# Altium PCB PCB2.PcbDoc
Units mil, origin at the board's own origin, x right, y up, seen from the top; angles counter-clockwise.
Board outline 2505 x 3540 mil, 4 copper layers (Top Layer, Int1 (GND), Int2 (GND), Bottom Layer), stack 53.912 mil thick; 42 components, 25 nets, 144 pads, 32 vias.
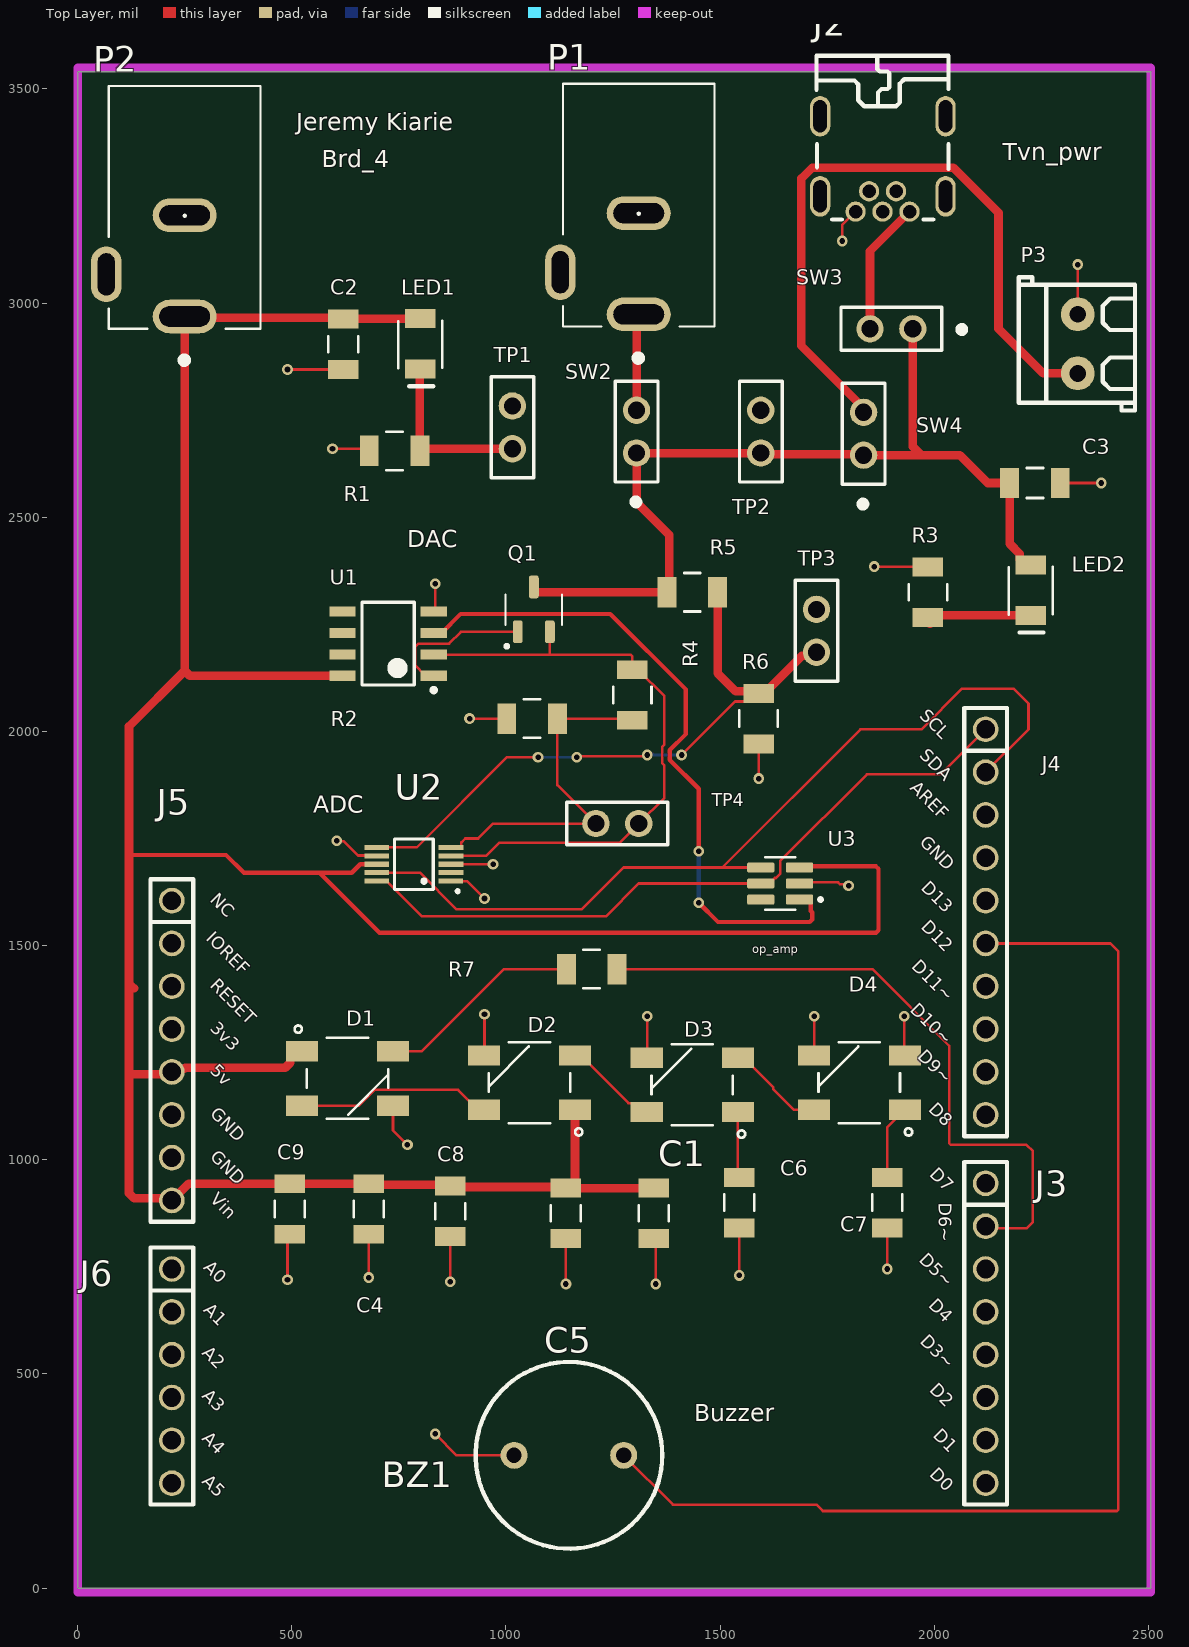
[diagram p0: Top Layer view]
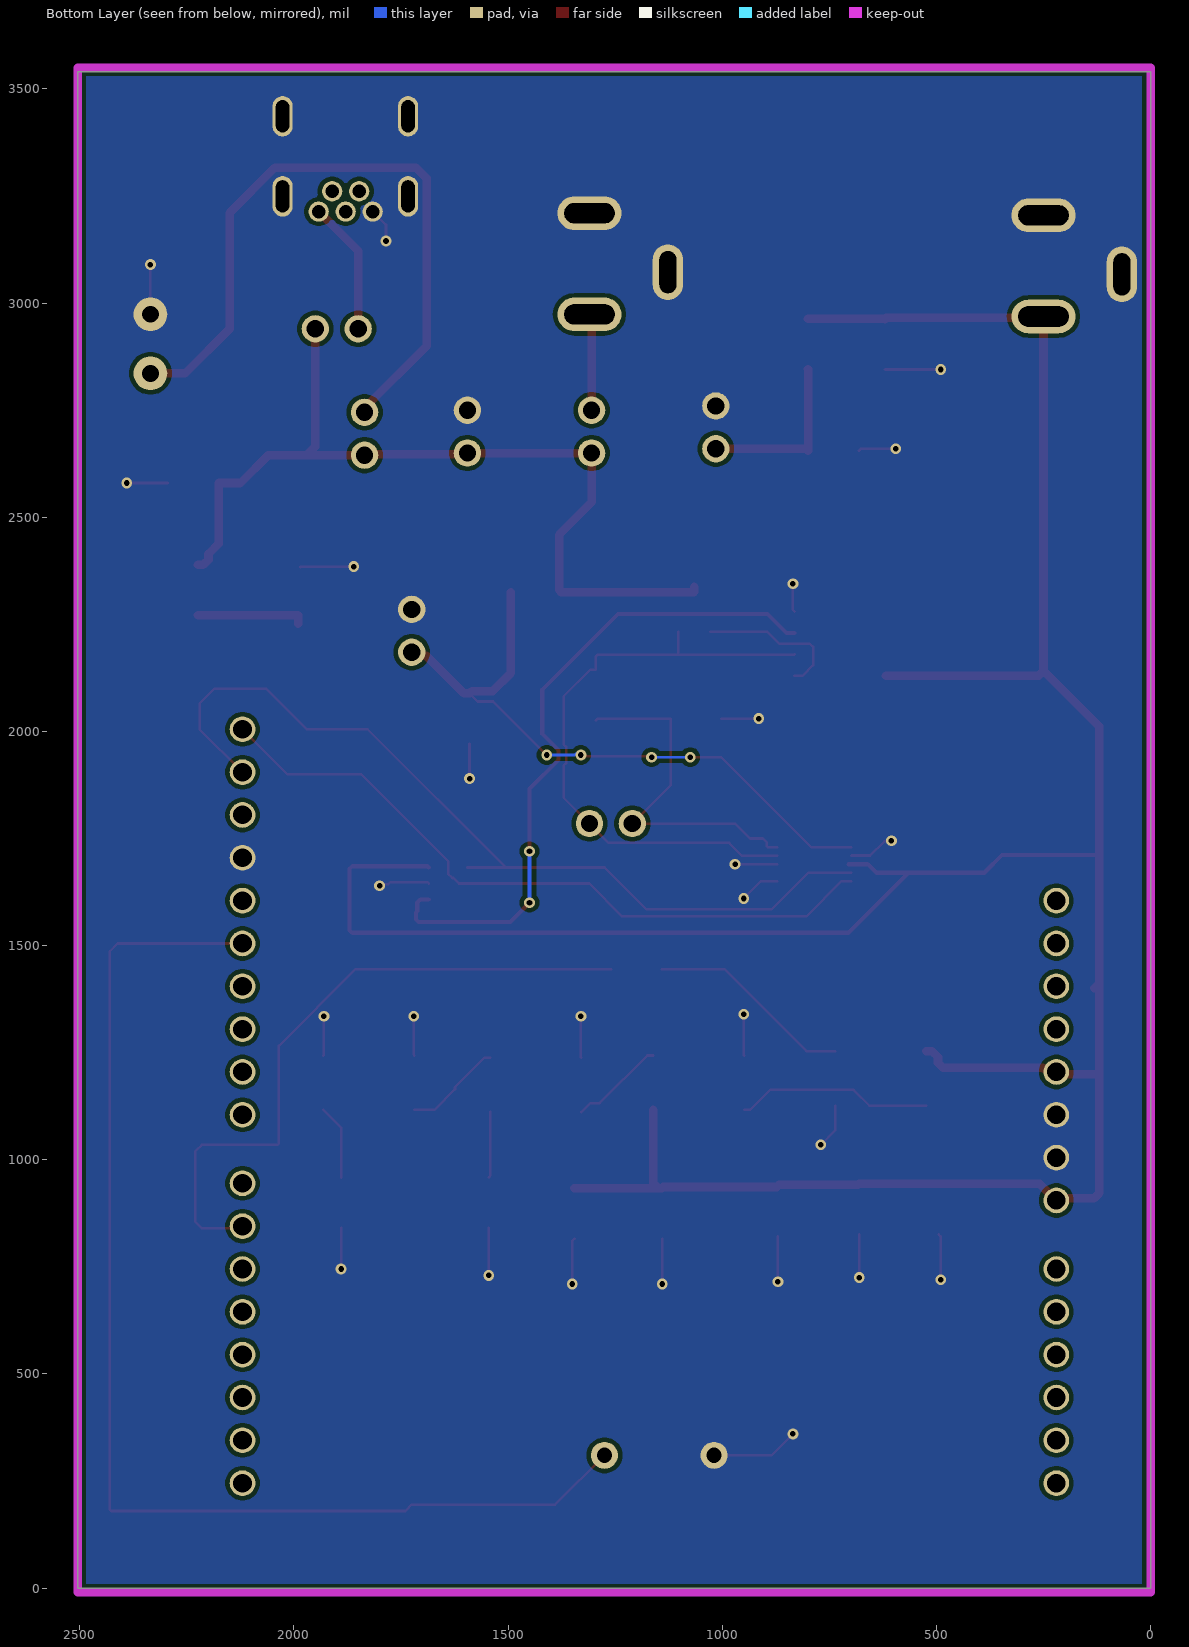
[diagram p1: Bottom Layer view, seen from below]
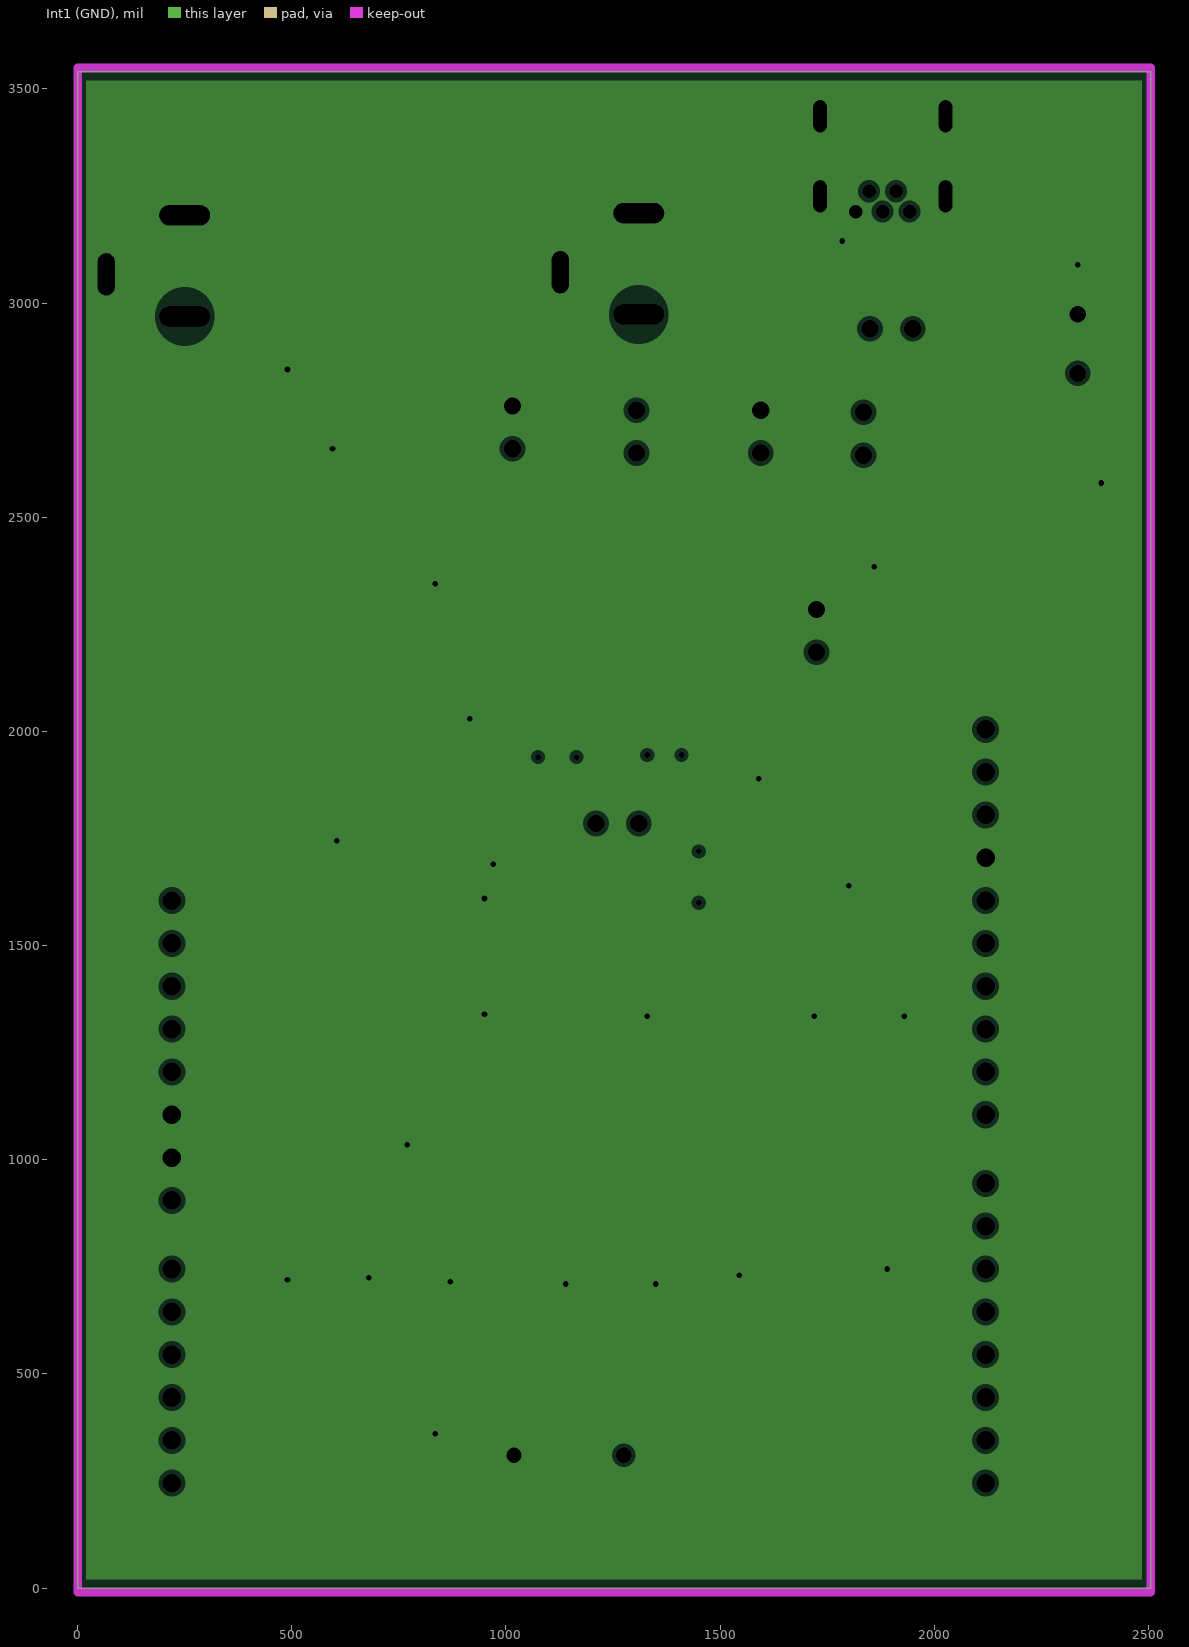
[diagram p2: Int1 (GND), clearances drawn from the general rule]
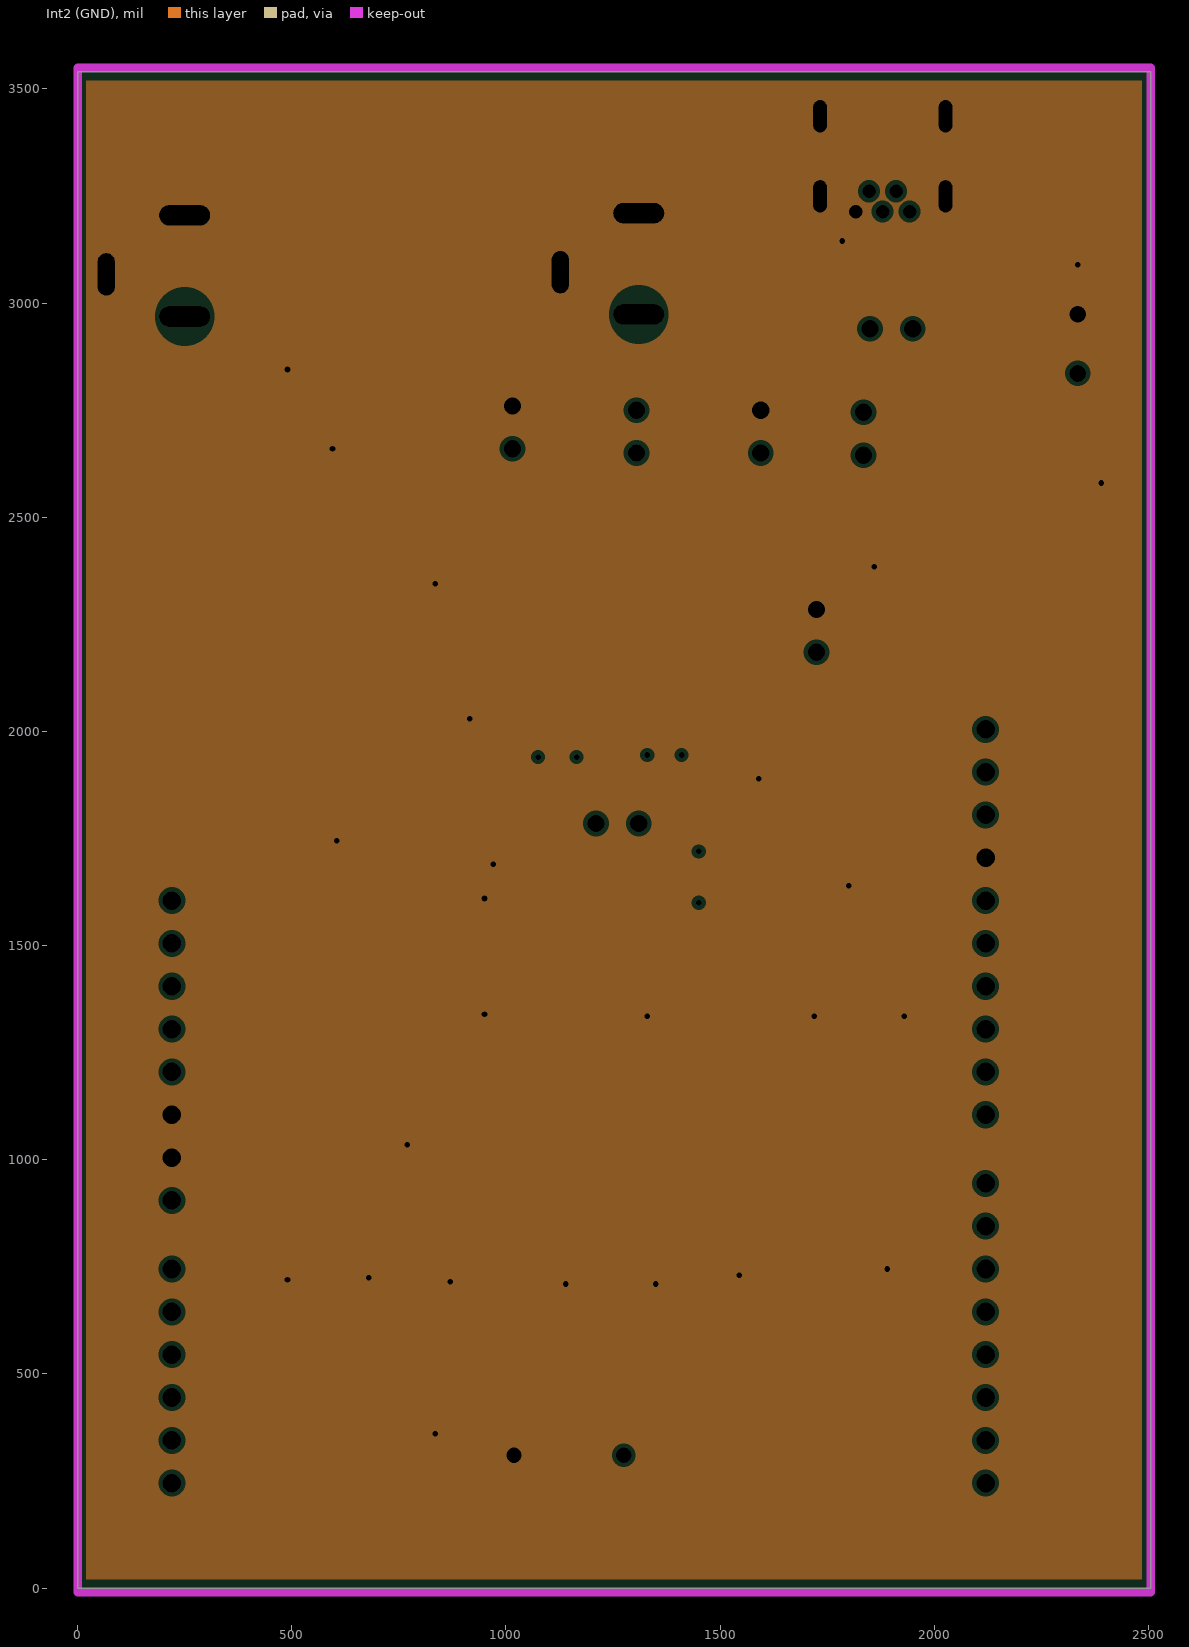
[diagram p3: Int2 (GND), clearances drawn from the general rule]
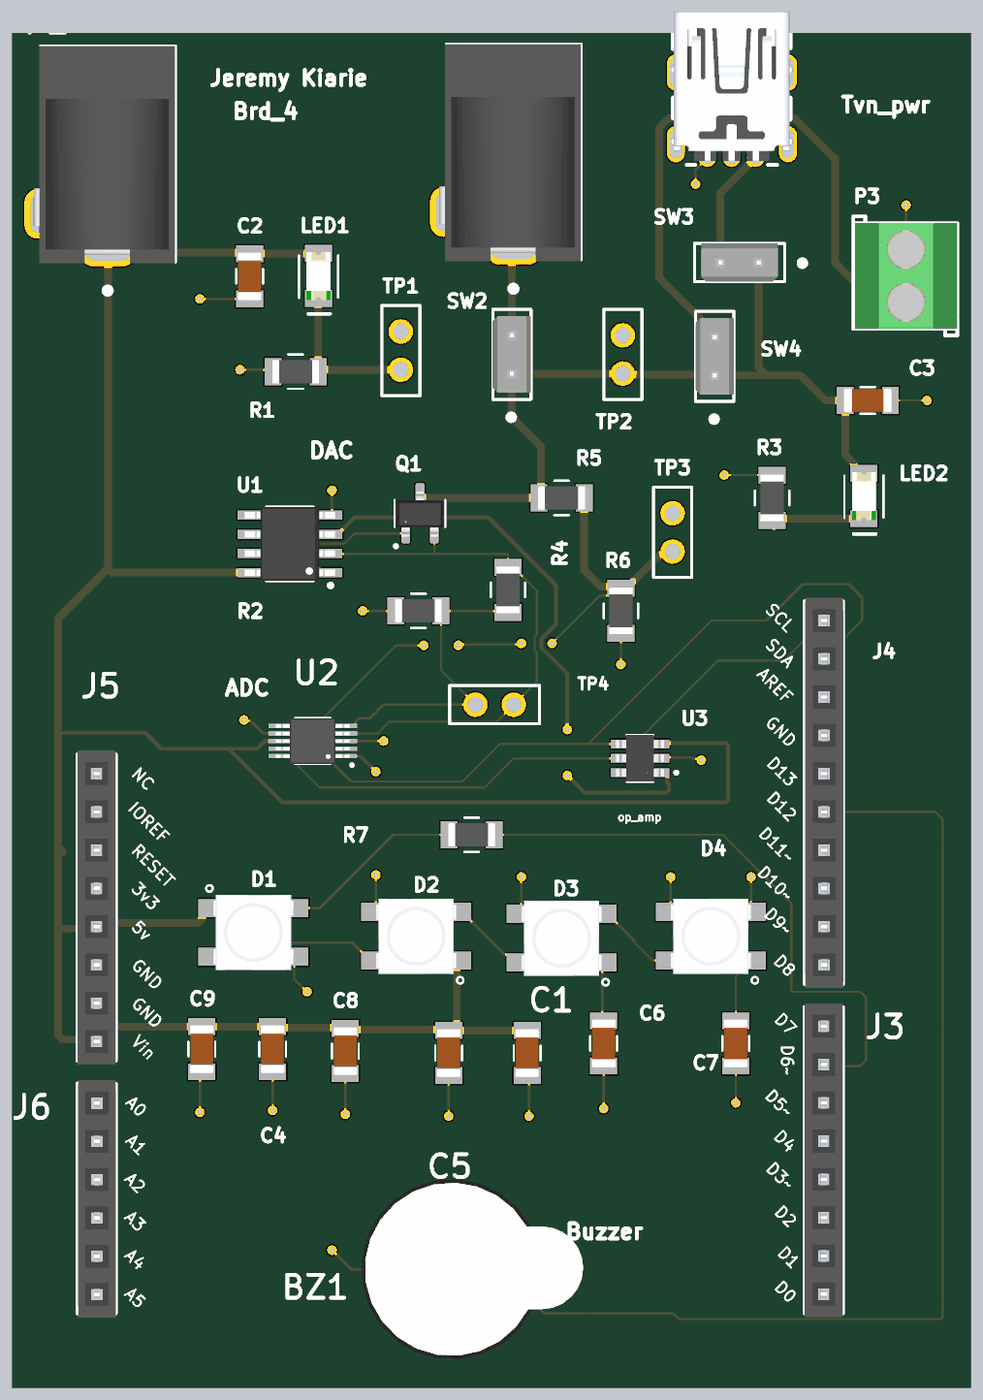
[diagram p4: 3D render of the assembled board from above, using the file's embedded part models]

## Layer stack, top to bottom
Top Solder: solder mask 1, SM-001, Dk 4
Top Layer: signal copper 1.378
Dielectric 1: prepreg 5.1, PP-017, Dk 4.3
Dielectric 2: prepreg 5.1, PP-017, Dk 4.3
Int1 (GND): plane copper 1.378, net GND
Dielectric 3: core 28, Core-039, Dk 4.8
Int2 (GND): plane copper 1.378, net GND
Dielectric 4: prepreg 5.1, PP-017, Dk 4.3
Dielectric 5: prepreg 5.1, PP-017, Dk 4.3
Bottom Layer: signal copper 1.378
Bottom Solder: solder mask 1, SM-001, Dk 4

## Board outline
0,0 2505,0 2505,3540 0,3540

## Design rules (kind name [scope] priority, off if disabled: settings)
Clearance [All] p1: gap=10 ignorepadtopadclearanceinfootprint=FALSE
PlaneClearance [All] p1: clearance=10
PlaneConnect [All] p1: planeconnectstyle=Direct reliefexpansion=20 reliefentries=4 reliefconductorwidth=10 reliefairgap=10
PolygonConnect [All] p1: connectstyle=Direct reliefconductorwidth=10 reliefentries=4 polygonreliefangle="90 Angle" airgapwidth=10
RoutingVias [All] p1: holewidth=13 width=25 viastyle="Through Hole" minholewidth=13 minwidth=25 maxholewidth=60 maxwidth=80
SolderMaskExpansion [All] p1: expansion=4 istentingtop=FALSE
SupplyNets "Schematic Supply Nets" [InNet('GND')] p1: voltage=0.000
UnRoutedNet [All] p1: checkbadconnections=TRUE
Width "Schematic Width Constraint_2" [InNet('+9V')] p1: maxlimit=100 minlimit=10 preferedwidth=20 minimp=50.000000 maximp=50.000000 favimp=50.000000
Width "Schematic Width Constraint_5" [InNet('+5V')] p2: maxlimit=100 minlimit=10 preferedwidth=20 minimp=50.000000 maximp=50.000000 favimp=50.000000
Width "Schematic Width Constraint_1" [InNet('3.3V')] p3: maxlimit=100 minlimit=10 preferedwidth=20 minimp=50.000000 maximp=50.000000 favimp=50.000000
Width "Schematic Width Constraint" [InNet('V_TH')] p4: maxlimit=100 minlimit=10 preferedwidth=20 minimp=50.000000 maximp=50.000000 favimp=50.000000
Width [All] p5: maxlimit=100 minlimit=6 preferedwidth=6 minimp=50.000000 maximp=50.000000 favimp=50.000000
27 further rules are at their usual default settings.

## Components (designator, comment, footprint, x,y, rotation, side; value= is the part's Value field where it differs from the comment)
BZ1 "AT-1224-TWT-5V-2-R" "BUZZER- TH" 1147.05,310 r270 top
C1 "22uF" 1206_Passive_Capacitor 1345,875 r90 top
C2 "22uF" 1206_Passive_Capacitor 620,2904 r90 top
C3 "22uF" 1206_Passive_Capacitor 2235,2580 r180 top
C4 "47nF" 1206_Passive_Capacitor 680,885 r90 top
C5 "47nF" 1206_Passive_Capacitor 1140,875 r90 top
C6 "47nF" 1206_Passive_Capacitor 1545,900 r90 top
C7 "47nF" 1206_Passive_Capacitor 1890,900 r90 top
C8 "22uF" 1206_Passive_Capacitor 870,880 r270 top
C9 "22uF" 1206_Passive_Capacitor 495,885 r270 top
D1 "IN-PI55QATPRPGPBPW" "SERIAL_LED - duplicate" 630,1190 r0 top
D2 "IN-PI55QATPRPGPBPW" "SERIAL_LED - duplicate" 1055,1180 r180 top
D3 "IN-PI55QATPRPGPBPW" "SERIAL_LED - duplicate" 1435,1175 r180 top
D4 "IN-PI55QATPRPGPBPW" "SERIAL_LED - duplicate" 1825,1180 r180 top
J2 "USB Mini" USB_MINI_B 1880,3325 r180 top value="USB mini B"
J3 "PPTC081LFBN-RC" 8_PIN_ARD-DIG_100MIL 2120,945 r270 top value=Female
J4 "PPTC101LFBN-RC" 10_PIN_ARDUINO_100MIL 2120,2005 r270 top value=Female
J5 "PPTC081LFBN-RC" 8_PIN_ARD-PWR_100MIL 220,1605 r270 top value=Female
J6 "PPTC061LFBN-RC" 6_PIN_ARD-Analog_100mil 220,745 r270 top value=Female
LED1 "Green" LED_1206 800,2905 r270 top
LED2 "Green" LED_1206 2225,2330 r270 top
P1 "Power Jack" Power_Jack 1310,2973.78 r90 top value="CONN PWR JACK 2X5.5MM SOLDER"
P2 "Power Jack" Power_Jack 250,2968.78 r90 top value="CONN PWR JACK 2X5.5MM SOLDER"
P3 "2P Screw Terminal Block" "P_Terminal block 3.5mm-pitch" 2335,2905 r90 top
Q1 "AO3400A" N-MOSFET 1065,2285 r90 top value="N channel"
R1 "1k" 1206_Passive_Resitor 740,2655 r0 top value="1K Ohm"
R2 "0 Ohm" 1206_Passive_Resitor 1061,2030 r0 top
R3 "1k" 1206_Passive_Resitor 1985,2325 r270 top value="1K Ohm"
R4 "10 Ohm" 1206_Passive_Resitor 1295,2085 r90 top
R5 "10k" 1206_Passive_Resitor 1435,2325 r0 top value=10KOhm
R6 "4.7KOhm" 1206_Passive_Resitor 1590,2030 r270 top
R7 "1k" 1206_Passive_Resitor 1200,1445 r0 top value="1K Ohm"
SW2 "SW_2Pin_100mil_Switch" 2Pin-Header-Conn 1305,2650 r90 top
SW3 "SW_2Pin_100mil_Switch" 2Pin-Header-Conn 1950,2940 r180 top
SW4 "SW_2Pin_100mil_Switch" 2Pin-Header-Conn 1835,2645 r90 top
TP1 "10x Probe TP" TP_Diff_Probe 1015,2660 r90 top
TP2 "10x Probe TP" TP_Diff_Probe 1595,2650 r90 top
TP3 "10x Probe TP" TP_Diff_Probe 1725,2185 r90 top
TP4 "10x Probe TP" TP_Diff_Probe 1310,1785 r180 top
U1 "MCP6002T-I/SN" SOIC127P600X175-8N 725,2205 r180 top
U2 "ADS1115IDGSR" ADC_ADS1115IDGSR 785,1690 r180 top
U3 "DAC IC" MCP4725 1640,1645 r180 top

## Footprints (in the part's own frame and the unit in brackets; to place one, negate y for a bottom-side part, rotate by r counter-clockwise, add the part's x,y. Pads: shape width x height; smd on the part's side, far side on the other; paste and mask are expansions set on the pad)
2Pin-Header-Conn [mm]
  round 1.62 hole 1.02: 1(0,0) 2(2.54,0)
  silkscreen extent -3.03,-1.27 4.26,1.26, body extent -1.27,-1.27 3.81,1.27, height 8.13
6_PIN_ARD-Analog_100mil [mil]
  round 60 hole 43.31: 1(0,0) 2(100,0) 3(200,0) 4(300,0) 5(400,0) 6(500,0)
  silkscreen extent -50,-50 550,50, body extent -59,-49 561,51, height 335
8_PIN_ARD-DIG_100MIL [mil]
  round 60 hole 43.31: 1(0,0) 2(100,0) 3(200,0) 4(300,0) 5(400,0) 6(500,0) 7(600,0) 8(700,0)
  silkscreen extent -50,-50 750,50, body extent -60,-50 760,50, height 335
8_PIN_ARD-PWR_100MIL [mil]
  round 60 hole 43.31: 1(0,0) 2(100,0) 3(200,0) 4(300,0) 5(400,0) 6(500,0) 7(600,0) 8(700,0)
  silkscreen extent -50,-50 750,50, body extent -60,-50 760,50, height 335
10_PIN_ARDUINO_100MIL [mil]
  round 60 hole 43.31: 1(0,0) 2(100,0) 3(200,0) 4(300,0) 5(400,0) 6(500,0) 7(600,0) 8(700,0) 9(800,0) 10(900,0)
  silkscreen extent -50,-50 950,50, body extent -60,-49 960,51, height 335
1206_Passive_Capacitor [mil]
  rect 44x71 smd: 1(-59,0) 2(59,0)
  silkscreen extent -19,-35 19,35, body extent -63,-31 63,32, height 50
1206_Passive_Resitor [mil]
  rect 44x71 smd: 1(-59,0) 2(59,0)
  silkscreen extent -19,-45 19,45, body extent -61,-31 61,31, height 26
ADC_ADS1115IDGSR [mm] "*SOP50P490X110-10N"
  rect 1.45x0.3 smd mask+0.025: 1(-2.2,1)
  rect 1.47x0.3 smd mask+0.025: 2(-2.2,0.5) 3(-2.2,0) 4(-2.2,-0.5) 5(-2.2,-1) 6(2.2,-1) 7(2.2,-0.5) 8(2.2,0) 9(2.2,0.5) 10(2.2,1)
  silkscreen extent -2.68,-1.5 1.15,1.68, body extent -2.44,-1.49 2.46,1.51, height 1.1
"BUZZER- TH" [mm]
  round 1.6 hole 0.9: 1(0,3.25) 2(0,-3.25)
  silkscreen extent -5.54,-5.53 5.54,5.54, body extent -6,-6 6,8.75, height 9.05
LED_1206 [mil]
  rect 44x71 smd: 1(-59,0) 2(59,0)
  silkscreen extent -54,-51 99,51, body extent -63,-31 63,31, height 28
MCP4725 [mm]
  rrect25% 1.61x0.59 smd: 1(-1.145,0.95) 2(-1.145,0) 3(-1.145,-0.95) 4(1.145,-0.95) 5(1.145,0) 6(1.145,0.95)
  silkscreen extent -2.5,-1.56 0.9,1.56, body extent -1.6,-1.55 1.6,1.55, height 1.45
N-MOSFET [mm]
  rrect50% 1.35x0.59 smd: 1(-1.33,0.95) 2(-1.33,-0.95) 3(1.33,0)
  silkscreen extent -2.28,-1.68 0.89,1.7, body extent -1.55,-1.55 1.45,1.55, height 1.25
"P_Terminal block 3.5mm-pitch" [mm]
  round 2 hole 1: 1(-1.75,0) 2(1.75,0)
  silkscreen extent -3.95,-3.4 3.95,3.5, body extent -3.5,-3.4 3.5,3.4, height 8.4
Power_Jack [mm]
  oval 2x3.8 hole 1.2 slot 3 at 90 deg: 1(0,0) 2(6,0)
  oval 3.3x1.8 hole 1 slot 2.5 at 0 deg: 3(2.5,4.65)
  silkscreen extent -2.79,-4.5 13.68,4.5, body extent -0.76,-4.45 13.64,4.95, height 11.49
"SERIAL_LED - duplicate" [mil] "Footprint for serial LED"
  rect 74.8x47.5 smd: 1(-106.3,63.5) 2(-106.3,-63.5) 3(106.3,-63.5) 4(106.3,63.5)
  silkscreen extent -124,-94 95,124, body extent -106,-98 106,98, height 63
SOIC127P600X175-8N [mm] "SOIC, 8-Leads, Body 4.90x3.90mm, Pitch 1.27mm, IPC Medium Density"
  rect 1.55x0.6 smd: 1(-2.7,1.905) 2(-2.7,0.635) 3(-2.7,-0.635) 4(-2.7,-1.905) 5(2.7,-1.905) 6(2.7,-0.635) 7(2.7,0.635) 8(2.7,1.905)
  silkscreen extent -2.83,-2.45 1.55,2.88, body extent -3,-2.45 3,2.45, height 1.75
TP_Diff_Probe [mm]
  round 1.62 hole 1.02: 1(0,0) 2(2.54,0)
  silkscreen extent -1.72,-1.27 4.26,1.26
USB_MINI_B [mm]
  round 1.2 hole 0.8: 1(-1.58,2.826) 2(-0.78,1.622) 3(0.02,2.826) 4(0.82,1.622) 5(1.62,2.826)
  oval 1.2x2.4 hole 0.8 slot 1.9 at 90 deg: 6(-3.72,1.924) 7(3.72,1.924) 8(-3.72,-2.826) 9(3.72,-2.826)
  silkscreen extent -3.89,-6.42 3.93,3.3, body extent -4.04,-6.83 4.06,3.02, height 3.98

## Part data
BZ1: library part BUZZER_1, "Buzzers Transducer, Externally Driven Electromechanical/Magnetic 5 V 40mA 2.4kHz 87dB @ 5V, 10cm Through Hole PC Pins", Datasheet=https://www.puiaudio.com/media/SpecSheet/AT-1224-TWT-5V-2-R.pdf
C1 C2 C3 C8 C9: library part C_22uF_1206, "22uF ±10% 25V X5R 1206 Multilayer Ceramic Capacitors MLCC - SMD/SMT RoHS", LCSC Part#=C12891, MFR Part #=CL31A226KAHNNNE, Datasheet=https://datasheet.lcsc.com/lcsc/1811031514_Samsung-Electro-Mechanics-CL31A226KAHNNNE_C12891.pdf, Type=basic
C4 C5 C6 C7: library part C_47nF_1206, "47nF ±5% 50V C0G 1206 Multilayer Ceramic Capacitors MLCC - SMD/SMT RoHS", LCSC Part#=C21812, MFR Part #=GRM31M5C1H473JA01L, Datasheet=https://datasheet.lcsc.com/lcsc/1810201313_Murata-Electronics-GRM31M5C1H473JA01L_C21812.pdf, Type=Extended
D1 D2 D3 D4: library part LED_Smart, "LIGHT EMITTING DIODES (LED) RGB 620~630NM RED, 520~530NM GREEN, 465~475NM BLUE 600MCD@16MARED,1200MCD@16MAGREEN,300MCD@16MABLUE TOP VIEW SMD-4 ROHS", LCSC Part#=C2843785, Manufacturer=XINGLIGHT, MFR Part #=XL-5050RGBC-WS2812B, Datasheet=https://datasheet.lcsc.com/lcsc/2301111130_XINGLIGHT-XL-5050RGBC-WS2812B_C2843785.pdf
J2: library part J_USB_B_Mini, "Through Hole USB Connectors RoHS", LCSC Part#=C46398, MFR Part #=920-462A2021D10102, Datasheet=https://datasheet.lcsc.com/szlcsc/2103081233_Jing-Extension-of-the-Electronic-Co-920-462A2021D10102_C46398.pdf, Type=Extended
J3: library part JF_8_PIN_FEMA_ARD-Dig, "8 Position Header Connector 0.100\" (2.54mm) Through Hole Tin", LCSC Part#=C27438, Digikey Link=https://www.digikey.com/product-detail/en/PPTC081LFBN-RC/S7006-ND/810147/?itemSeq=304982354, MFR Part #=PPTC081LFBN-RC, Type=Extended
J4: library part JF_10_PIN_FEMA_ARDUINO, "10 Position Header Connector 0.100\" (2.54mm) Through Hole Tin", LCSC Part#=C225507, Digikey Link=https://www.digikey.com/product-detail/en/PPTC101LFBN-RC/S7008-ND/810149/?itemSeq=304982352, MFR Part #=PPTC101LFBN-RC, Type=Extended
J5: library part JF_8_PIN_FEMA_ARD-Pwr, "8 Position Header Connector 0.100\" (2.54mm) Through Hole Tin", LCSC Part#=C27438, Digikey Link=https://www.digikey.com/product-detail/en/PPTC081LFBN-RC/S7006-ND/810147/?itemSeq=304982354, MFR Part #=PPTC081LFBN-RC, Type=Extended
J6: library part JF_6_PIN_FEMA_ARD-Anolog, "6 Position Header Connector 0.100\" (2.54mm) Through Hole Tin", LCSC Part#=C40877, Digikey Link=https://www.digikey.com/product-detail/en/PPTC061LFBN-RC/S7004-ND/810145/?itemSeq=304982353, MFR Part #=PPTC061LFBN-RC, Type=Extended
LED1 LED2: library part LED_GREEN_1206, "Green 513~528nm 1206 Light Emitting Diodes (LED) RoHS", LCSC Part#=C434439, MFR Part #=SZYY1206G, Datasheet=https://datasheet.lcsc.com/lcsc/2006301532_Yongyu-Photoelectric-SZYY1206G_C434439.pdf, Type=Extended
P1 P2: library part "P_Power Jack", "Power Barrel Connector Jack 2.10mm ID (0.083\"), 5.50mm OD (0.217\") Through Hole, Right Angle", LCSC Part#=C136744, MFR Part #=PJ-102A, Digikey Link=https://www.digikey.com/product-detail/en/PJ-102A/CP-102A-ND/275425/?itemSeq=304982367, Type=Extended
P3: library part "P_Terminal block", "Green Straight pin 3.5mm  pitch; P=3.5mm  Screw terminal ROHS", LCSC Part#=C474892, Manufacturer="Cixi Kefa Elec", MFR Part #=KF350-3.5-2P, Datasheet=https://datasheet.lcsc.com/lcsc/2001160007_Cixi-Kefa-Elec-KF350-3-5-2P_C474892.pdf
Q1: library part Q_Nch_MOSFET, "MOSFET N Trench 30V 5.7A 1.5V @ 250uA 26.5 m? @ 5.7A,10V SOT-23-3L RoHS", LCSC Part#=C20917, Datasheet=https://datasheet.lcsc.com/szlcsc/Alpha-Omega-Semicon-AOS-AO3400A_C20917.pdf, MFR Part #=AO3400A, Type=Basic
R1 R3 R7: library part R_1K_1206, "CHIP RESISTOR - SURFACE MOUNT 1KOHMS ±1% 1/4W 1206 ROHS", LCSC Part#=C4410, MFR Part #=RNCP1206FTD1K00CT, Digikey Link=https://www.digikey.com/product-detail/en/RNCP1206FTD1K00/RNCP1206FTD1K00CT-ND/2240675/?itemSeq=304982373, Type=Basic
R2: library part R_0Ohm_1206, "CHIP RESISTOR - SURFACE MOUNT 0OHMS ±1% 1/4W 1206 ROHS", LCSC Part#=C17888, MFR Part #=1206W4F0000T5E, Datasheet=https://datasheet.lcsc.com/szlcsc/Uniroyal-Elec-1206W4F0000T5E_C17888.pdf, Mouser link=https://www.mouser.com/ProductDetail/Royalohm/1206W4F0000T5E?qs=e8oIoAS2J1Thbopin%252BsagQ%3D%3D, Type=Basic
R4: library part R_10Ohm_1206, "CHIP RESISTOR - SURFACE MOUNT 0.1OHMS ±1% 1/4W 1206 ROHS", LCSC Part#=C17903, MFR Part #=1206W4F100JT5E, Datasheet=https://datasheet.lcsc.com/szlcsc/Uniroyal-Elec-1206W4F100JT5E_C17903.pdf, Type=Basic
R5: library part R_10KOhm_1206, "10 kOhms ±5% 0.25W, 1/4W Chip Resistor 1206 (3216 Metric) Automotive AEC-Q200 Thick Film", LCSC Part#=C17902, MFR Part #=RMCF1206FT10K0, Digikey Link=https://www.digikey.com/en/products/detail/stackpole-electronics-inc/RMCF1206FT10K0/1759669, Type=Basic
R6: library part R_4.7k_1206, "4.7kΩ ±1% 0.25W ±100ppm/℃ 1206 Chip Resistor - Surface Mount RoHS", LCSC Part#=C17936, MFR Part #=1206W4F4701T5E, Datasheet=https://datasheet.lcsc.com/lcsc/1810301414_UNI-ROYAL-Uniroyal-Elec-1206W4F4701T5E_C17936.pdf, Type=Basic
SW2 SW3 SW4: "2Pin Header", LCSC Part#=C124375, Type=Extended
TP1 TP2 TP3 TP4: library part TP_Diff_Probe, "Test Point 300 mil centers"
U1: library part U_MCP6002T-I/SN, "0.6 V/us 2 1MHz 1.8V ~ 6V 100μA General Purpose SOIC-8_150mil  Operational Amplifier ROHS", LCSC Part#=C7377, Mfr=Microchip, Datasheet=https://ww1.microchip.com/downloads/en/DeviceDoc/MCP6001-1R-1U-2-4-1-MHz-Low-Power-Op-Amp-DS20001733L.pdf, MFR Part #=MCP6002T-I/SN, Type=Basic
U2: library part U_ADC_ADS1115IDGSR, "16-Bit ADC with Integrated MUX, PGA, Comparator, Oscillator, and Reference 10-VSSOP -40 to 125", LCSC Part#=C37593, Package="MSOP-10 Texas Instruments", Digikey Link=https://www.digikey.com/product-detail/en/texas-instruments/ADS1115IDGSR/296-38849-1-ND/5142969?utm_source=snapeda&utm_medium=aggregator&utm_campaign=symbol, MFR Part #=ADS1115IDGSR, SnapEDA_Link=https://www.snapeda.com/parts/ADS1115IDGSR/Texas%20Instruments/view-part/?ref=snap, Type=Extended
U3: library part U_MCP4725A0T-E/CH, "IC DAC 12BIT V-OUT SOT23-6", LCSC Part#=C144198, MFR Part #=MCP4725A0T-E/CH, Datasheet=https://ww1.microchip.com/downloads/en/DeviceDoc/22039d.pdf, Type=Extended

## Via types
v1: diameter 25, hole 13, Top Layer to Bottom Layer, 32 vias

## Nets (pads, with @x,y where several pads share a name; then routed paths per layer and width w, separated by ;. In a path a pad name is that pad's centre, name@x,y a point inside that pad or via, vN(x,y) a via of type N, cw(c..) or ccw(c..) an arc to the next point about the centre after c; other vN are vias at no path point)
3.3V: J5.4
+5V: C1.2 C2.2 C4.2 C5.2 C8.1 C9.1 D1.1 D2.1 J5.5 J5.8 LED1.1 P2.1 U1.8 U2.8 U3.3 | length 7220.6
  Top Layer w10: 120,1711.72 346.64,1711.72 388.36,1670 565,1670 ; U2.8@705,1690 U2.8 660,1690 640,1670 565,1670 ; U3.3 1687.68,1685 1864.14,1685 1870,1679.14 1870,1535.86 1864.14,1530 705,1530 565,1670
  Top Layer w20: 131.72,1400 120,1411.72 ; J5.8 259,944 C9.1 C4.2 682.5,941.5 867.5,941.5 C8.1 872.5,936.5 1137.5,936.5 C5.2 C5.2@1149.3,934 ; J5.8@220,910 131.72,910 120,921.72 120,1200 ; J5.5@220,1200 120,1200 ; J5.5 227.65,1212.65 249.37,1212.65 251.72,1215 484.58,1215 496.3,1226.72 496.3,1239.75 510.05,1253.5 D1.1 ; U1.8 261.72,2130 250,2141.72 ; LED1.1 799.5,2963.5 620.5,2963.5 C2.2 617.11,2965.89 252.89,2965.89 P2.1 250,2141.72 ; D2.1 1161.3,946 C5.2@1149.3,934 ; C1.2 C5.2@1149.3,934 ; 120,1200 120,1411.72 ; 120,1411.72 120,1711.72 120,2011.72 250,2141.72
+9V: P1.1 SW2.2 | length 225.9
  Top Layer w20: SW2.2 1305,2968.78 P1.1
GND: BZ1.2 C1.1 C2.1 C3.1 C4.1 C5.1 C6.1 C7.1 C8.2 C9.2 D1.3 D2.3 D3.3 D4.2 D4.3 J2.5 J2.6 J2.7 J2.8 J2.9 J4.4 J5.6 J5.7 P1.2 P1.3 P2.2 P2.3 P3.2 R1.1 R2.1 R3.1 R6.2 TP1.2 TP2.2 TP3.2 U1.4 U2.1 U2.3 U2.7 U3.2 | length 2733.4
  Top Layer w6: v1(490,720) 490,821 C9.2 ; v1(490,2845) C2.1 ; v1(595,2660) 676,2660 R1.1 ; v1(605,1745) 606.7,1743.3 621.7,1743.3 654.54,1710.46 697.61,1710.46 U2.7 ; v1(680,725) C4.1 ; D1.3 736.3,1068.7 v1(770,1035) ; U1.4 835,2283.7 v1(835,2345) ; v1(835,360) 885,310 BZ1.2 BZ1.2@1030.66,298.43 ; v1(870,715) C8.2 ; U2.1 909.37,1650.63 v1(950,1610) ; U2.3 v1(970,1690) ; v1(915,2030) R2.1 ; D2.3 950,1244.8 v1(950,1340) ; v1(1140,710) C5.1 ; D3.3 1330,1239.8 v1(1330,1335) ; C1.1 1350,811 v1(1350,710) ; v1(1545,730) C6.1 ; v1(1590,1890) R6.2 ; U3.2 1687.58,1647.5 1775.5,1647.5 1779.36,1643.64 1796.36,1643.64 v1(1800,1640) ; D4.3 1720,1244.8 v1(1720,1335) ; v1(1785,3145) 1785,3182.52 J2.5 ; v1(1860,2385) 1984,2385 R3.1 ; v1(1890,745) C7.1 ; v1(1930,1335) 1930,1244.8 D4.2 ; C3.1 v1(2390,2580) ; P3.2 v1(2335,3090)
NetC6_2: C6.2 D3.1 | length 154
  Top Layer w6: D3.1 1541.3,962.7 C6.2
NetC7_2: C7.2 D4.1 | length 175.1
  Top Layer w6: C7.2@1890,958.49 1890,1075.2 D4.1
NetD1_2: D1.2 D2.4 | length 459.6
  Top Layer w6: D1.2 656.76,1126.5 693.51,1163.25 888.3,1163.25 935.05,1116.5 D2.4
NetD1_4: D1.4 R7.1 | length 484
  Top Layer w6: D1.4 803.5,1253.5 995,1445 R7.1
NetD2_2: D2.2 D3.4 | length 222.1
  Top Layer w6: D2.2 1174.95,1243.5 1286.2,1132.25 1307.95,1132.25 D3.4
NetD3_2: D3.2 D4.4 | length 230.7
  Top Layer w6: D3.2 1554.95,1238.5 1624,1169.45 1624,1164.8 1672.3,1116.5 D4.4
NetJ2_1: J2.1 SW3.2 | length 311.9
  Top Layer w20: SW3.2 1850,3121.54 J2.1
NetLED1_2: LED1.2 R1.2 TP1.1 | length 409.5
  Top Layer w20: LED1.2 799,2845 R1.2 804,2660 TP1.1
NetLED2_2: LED2.2 R3.2 | length 254.5
  Top Layer w20: R3.2@1990,2251.47 1990,2271 LED2.2
NetP3_1: P3.1 SW4.2 | length 1619.7
  Top Layer w20: SW4.2 1835,2755 1689.92,2900.08 1689.92,3290.94 1715.48,3316.49 2044.52,3316.49 2150,3211.01 2150,2940 2254.22,2835.78 2270.78,2835.78 2271.1,2836.1 P3.1
NetQ1_1: Q1.1 U1.1 | length 350.7
  Top Layer w6: U1.1 812.6,2130 787.79,2154.81 787.79,2197.2 795.78,2205.19 867.2,2205.19 894.64,2232.64 Q1.1
NetU1_3: U1.3 U3.1 | length 1578.3
  Top Layer w10: U1.3 850,2230 894.21,2274.21 1243.5,2274.21 1420,2097.71 1420,1993.89 1382.5,1956.39 1382.5,1933.61 1450,1866.11 v1(1450,1720) ; v1(1450,1600) 1495,1555 1709.14,1555 1715,1560.86 1715,1577.76 1711.77,1580.98 1711.77,1600.98 1705.16,1607.6 U3.1
  Bottom Layer w10: v1(1450,1600) v1(1450,1720)
PB4_D12: BZ1.1 J4.6 | length 2830.9
  Top Layer w6: BZ1.1 1390,195 1725,195 1740,180 2426.49,180 2430,183.51 2430,1486.49 2411.49,1505 J4.6
PC6_RST: J5.3
PD6_D6: J3.2 R7.2 | length 1563.6
  Top Layer w6: R7.2 1856.06,1445 2035,1266.06 2035,1038.51 2038.51,1035 2215,1035 2230,1020 2230,855 2215,840 2125,840 J3.2
SCL_A5: J4.1 U2.10 U3.5 | length 1653.9
  Top Layer w6: U2.10 721.42,1650.63 803.55,1568.5 1233.5,1568.5 1310,1645 U3.5 1615,1645 1627.79,1657.79 1630.3,1657.79 1640,1667.49 1640,1697.31 1842.69,1900 2015,1900 J4.1
SDA_A4: J4.2 U2.9 U3.4 | length 2076.5
  Top Layer w6: U2.9 799.1,1670.32 884.91,1584.5 1176.62,1584.5 1274.52,1682.4 1505,1682.4 ; U3.4 1505,1682.4 ; J4.2 2220,2005 2220,2065 2185,2100 2065,2100 1970,2005 1827.6,2005 1505,1682.4
V_current+: Q1.2 R4.2 TP4.1 U1.2 U2.4 | length 1447.8
  Top Layer w6: U1.2 832.62,2178.68 1102.4,2178.68 ; U2.4 953.62,1709.68 984.05,1740.11 1265.11,1740.11 TP4.1 1370,1845 1370,1920.65 1364.5,1926.15 1364.5,1963.85 1370,1969.35 1370,2082.5 1308.5,2144 R4.2 1295,2175.16 1291.49,2178.68 1102.4,2178.68 ; Q1.2 1102.4,2178.68
V_current-: R2.2 R4.1 TP4.2 U2.5 | length 825.3
  Top Layer w6: U2.5 892.86,1729.37 895.76,1732.28 895.76,1740.76 905,1750 935,1750 970,1785 TP4.2 1120,1875 R2.2 1291,2030 R4.1
V_TH: C3.2 LED2.1 Q1.3 R5.1 SW2.1 SW3.1 SW4.1 TP2.1 | length 2103.5
  Top Layer w20: Q1.3 1065,2326.61 1066.61,2325 R5.1 1381,2330 1381,2459 1305,2535 SW2.1 TP2.1 1597.5,2647.5 1832.5,2647.5 SW4.1 1970,2645 ; SW3.1 1950,2665 1970,2645 ; LED2.1 2211.5,2389 2199.5,2401 2199.5,2414.5 2176,2438 C3.2 2125,2580 2060,2645 1970,2645
V_VRM: R5.2 R6.1 TP3.1 U2.6 | length 1521.9
  Top Layer w6: U2.6 791.78,1729.37 1002.41,1940 v1(1075,1940) ; v1(1165,1940) 1167.5,1942.5 1327.5,1942.5 v1(1330,1945) ; v1(1410,1945) 1535,2070 1571,2070 R6.1
  Top Layer w20: R5.2 1494,2136 1536.22,2093.78 1585.22,2093.78 R6.1 1603.5,2089 1691.12,2176.62 1716.62,2176.62 TP3.1
  Bottom Layer w6: v1(1075,1940) v1(1165,1940) ; v1(1330,1945) 1332.51,1947.51 1342.49,1947.51 1345,1945 v1(1410,1945)
pads on no net: J2.2 J2.3 J2.4 J3.1 J3.3 J3.4 J3.5 J3.6 J3.7 J3.8 J4.3 J4.5 J4.7 J4.8 J4.9 J4.10 J5.1 J5.2 J6.1 J6.2 J6.3 J6.4 J6.5 J6.6 U1.5 U1.6 U1.7 U2.2 U3.6

## Polygon pours and split planes (outlines as drawn)
GND on Bottom Layer "GND_L04_P000" (solid, pour order 0): 0,0 2505,0 2505,3540 0,3540
GND on Int2 (GND) (split plane): 2484.9,20.1 20.1,20.1 20.1,3519.9 2484.9,3519.9
GND on Int1 (GND) (split plane): 2484.9,20.1 20.1,20.1 20.1,3519.9 2484.9,3519.9

## Keep-outs
Keep-Out Layer:
  lines w20: 0,-10 626.25,-10 1878.75,-10 2505,-10 2505,3550 0,3550 0,-10

## Silkscreen, mask and mechanical layers (free items; w line width, h text height)
Top Overlay:
  text "Jeremy Kiarie" at 510,3403.33 h40
  text "Tvn_pwr" at 2160,3333.33 h40
  text "Brd_4" at 570,3316.66 h40
  text "DAC" at 770,2430 h40
  text "ADC" at 550,1810 h40
  text "op_amp" at 1575,1481.66 h20
  text "Buzzer" at 1440,390 h40

## Text inside footprints (layer, text, board x,y; h text height)
J3: Top Overlay "D7" at 1986.81,964 h30 r315; Top Overlay "D6~" at 2010,900 h30 r270; Top Overlay "D4" at 1985,658 h30 r315; Top Overlay "D3~" at 1965,574 h30 r315; Top Overlay "D2" at 1987,461 h30 r315; Top Overlay "D1" at 1995,354 h30 r315; Top Overlay "D0" at 1986.81,264 h30 r315; Top Overlay "D5~" at 1962.07,764 h30 r315
J4: Top Overlay "D8" at 1984.41,1116 h30 r315; Top Overlay "D9~" at 1959.67,1239 h30 r315; Top Overlay "D10~" at 1942,1348 h30 r315; Top Overlay "D11~" at 1945.53,1449 h30 r315; Top Overlay "D12" at 1966.74,1542 h30 r315; Top Overlay "D13" at 1966.74,1633 h30 r315; Top Overlay "GND" at 1963.21,1739 h30 r315; Top Overlay "AREF" at 1942,1866 h30 r315; Top Overlay "SDA" at 1963.21,1942 h30 r315; Top Overlay "SCL" at 1963.21,2034 h30 r315
J5: Top Overlay "RESET" at 307.07,1405 h30 r315; Top Overlay "Vin" at 307.07,905 h30 r315; Top Overlay "GND" at 307.07,1005 h30 r315; Top Overlay "GND" at 307.07,1105 h30 r315; Top Overlay "5v" at 307.07,1205 h30 r315; Top Overlay "3v3" at 307.07,1305 h30 r315; Top Overlay "IOREF" at 298.39,1515 h30 r315; Top Overlay "NC" at 307.07,1605 h30 r315
J6: Top Overlay "A5" at 289.07,247 h30 r315; Top Overlay "A4" at 289.07,347 h30 r315; Top Overlay "A3" at 289.07,447 h30 r315; Top Overlay "A2" at 289.07,547 h30 r315; Top Overlay "A0" at 292,747 h30 r315; Top Overlay "A1" at 292,647 h30 r315